# EAGLE board LEDboard (EAGLE 9.5.2)
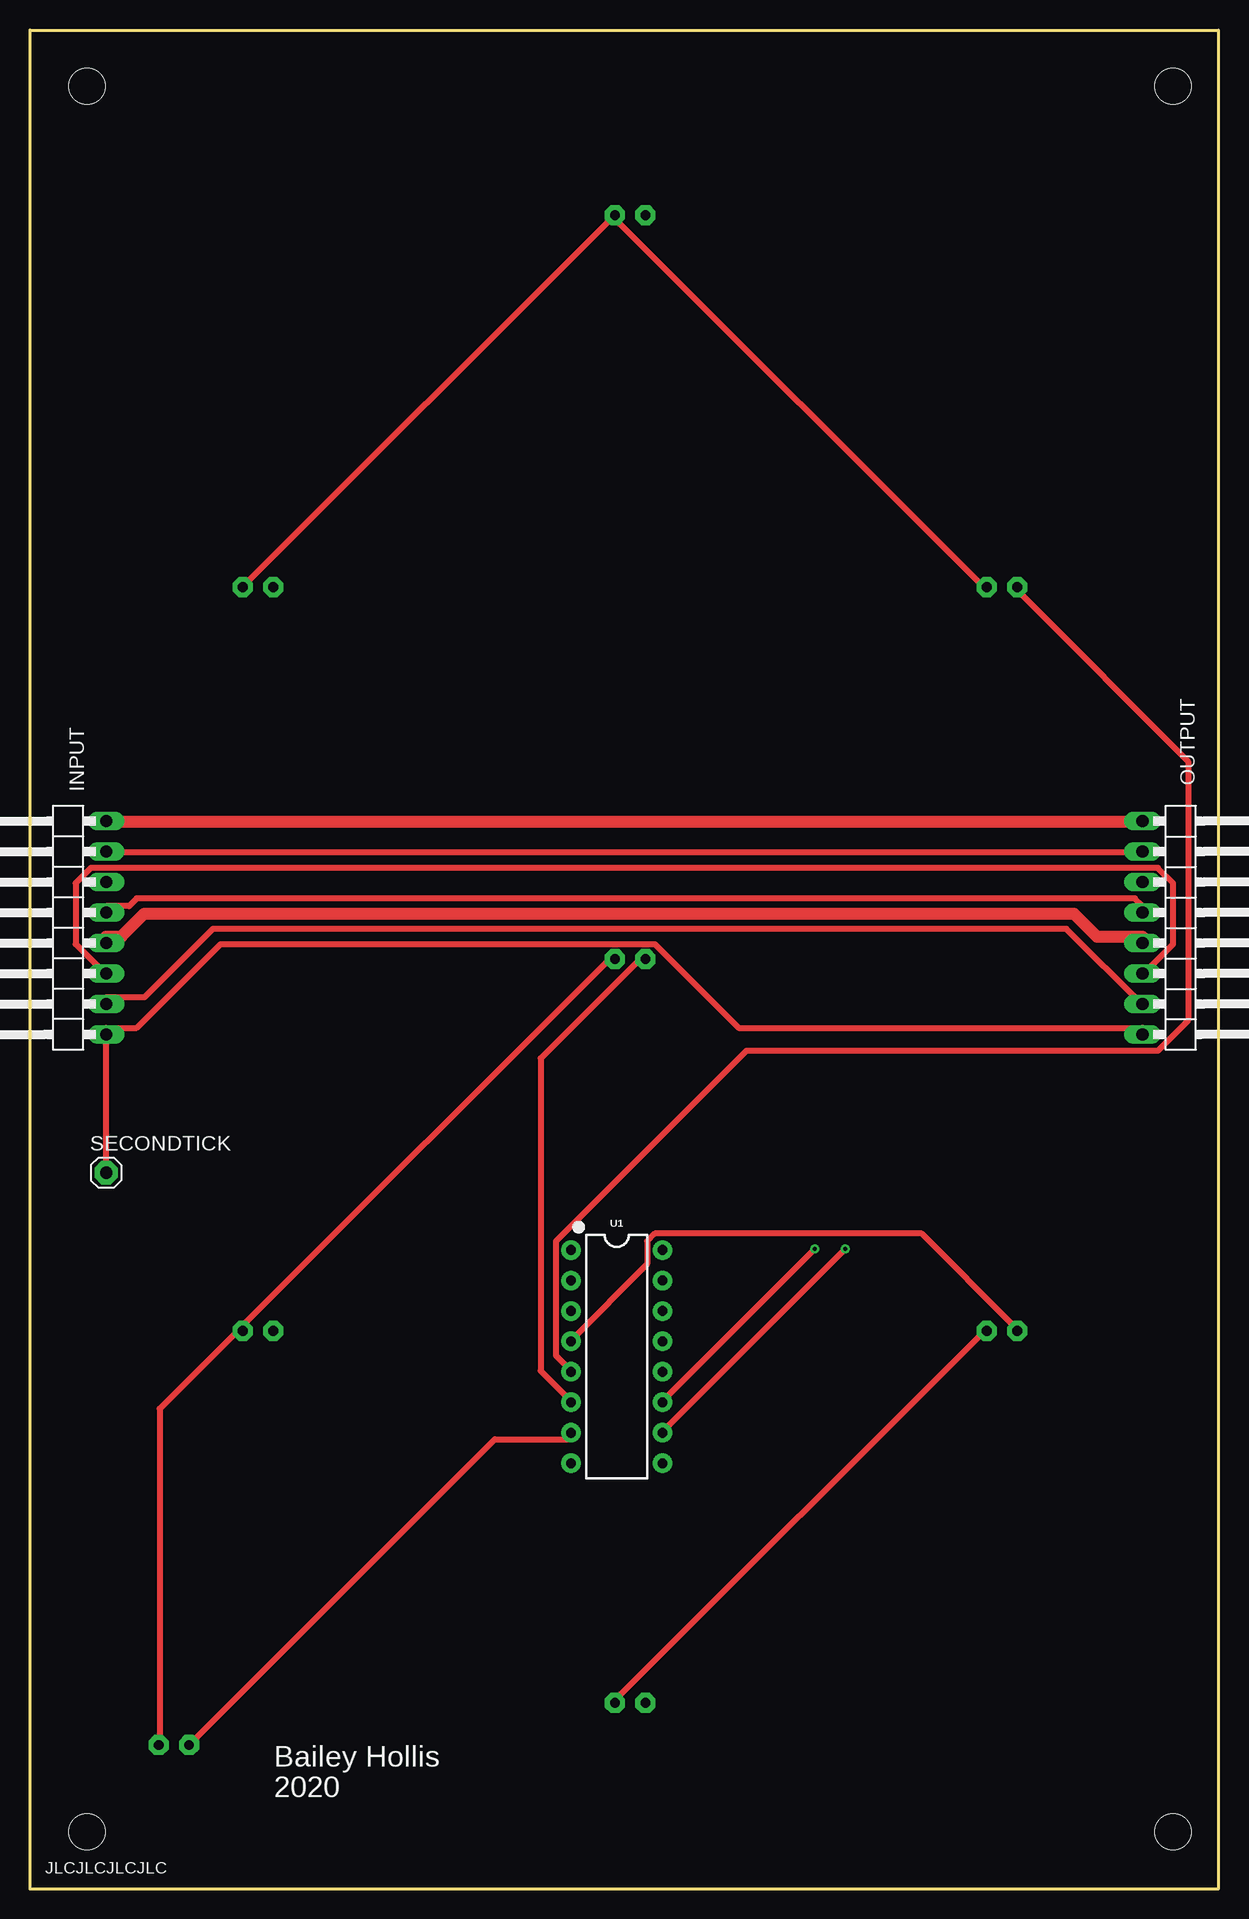
[diagram p0: board, top side]
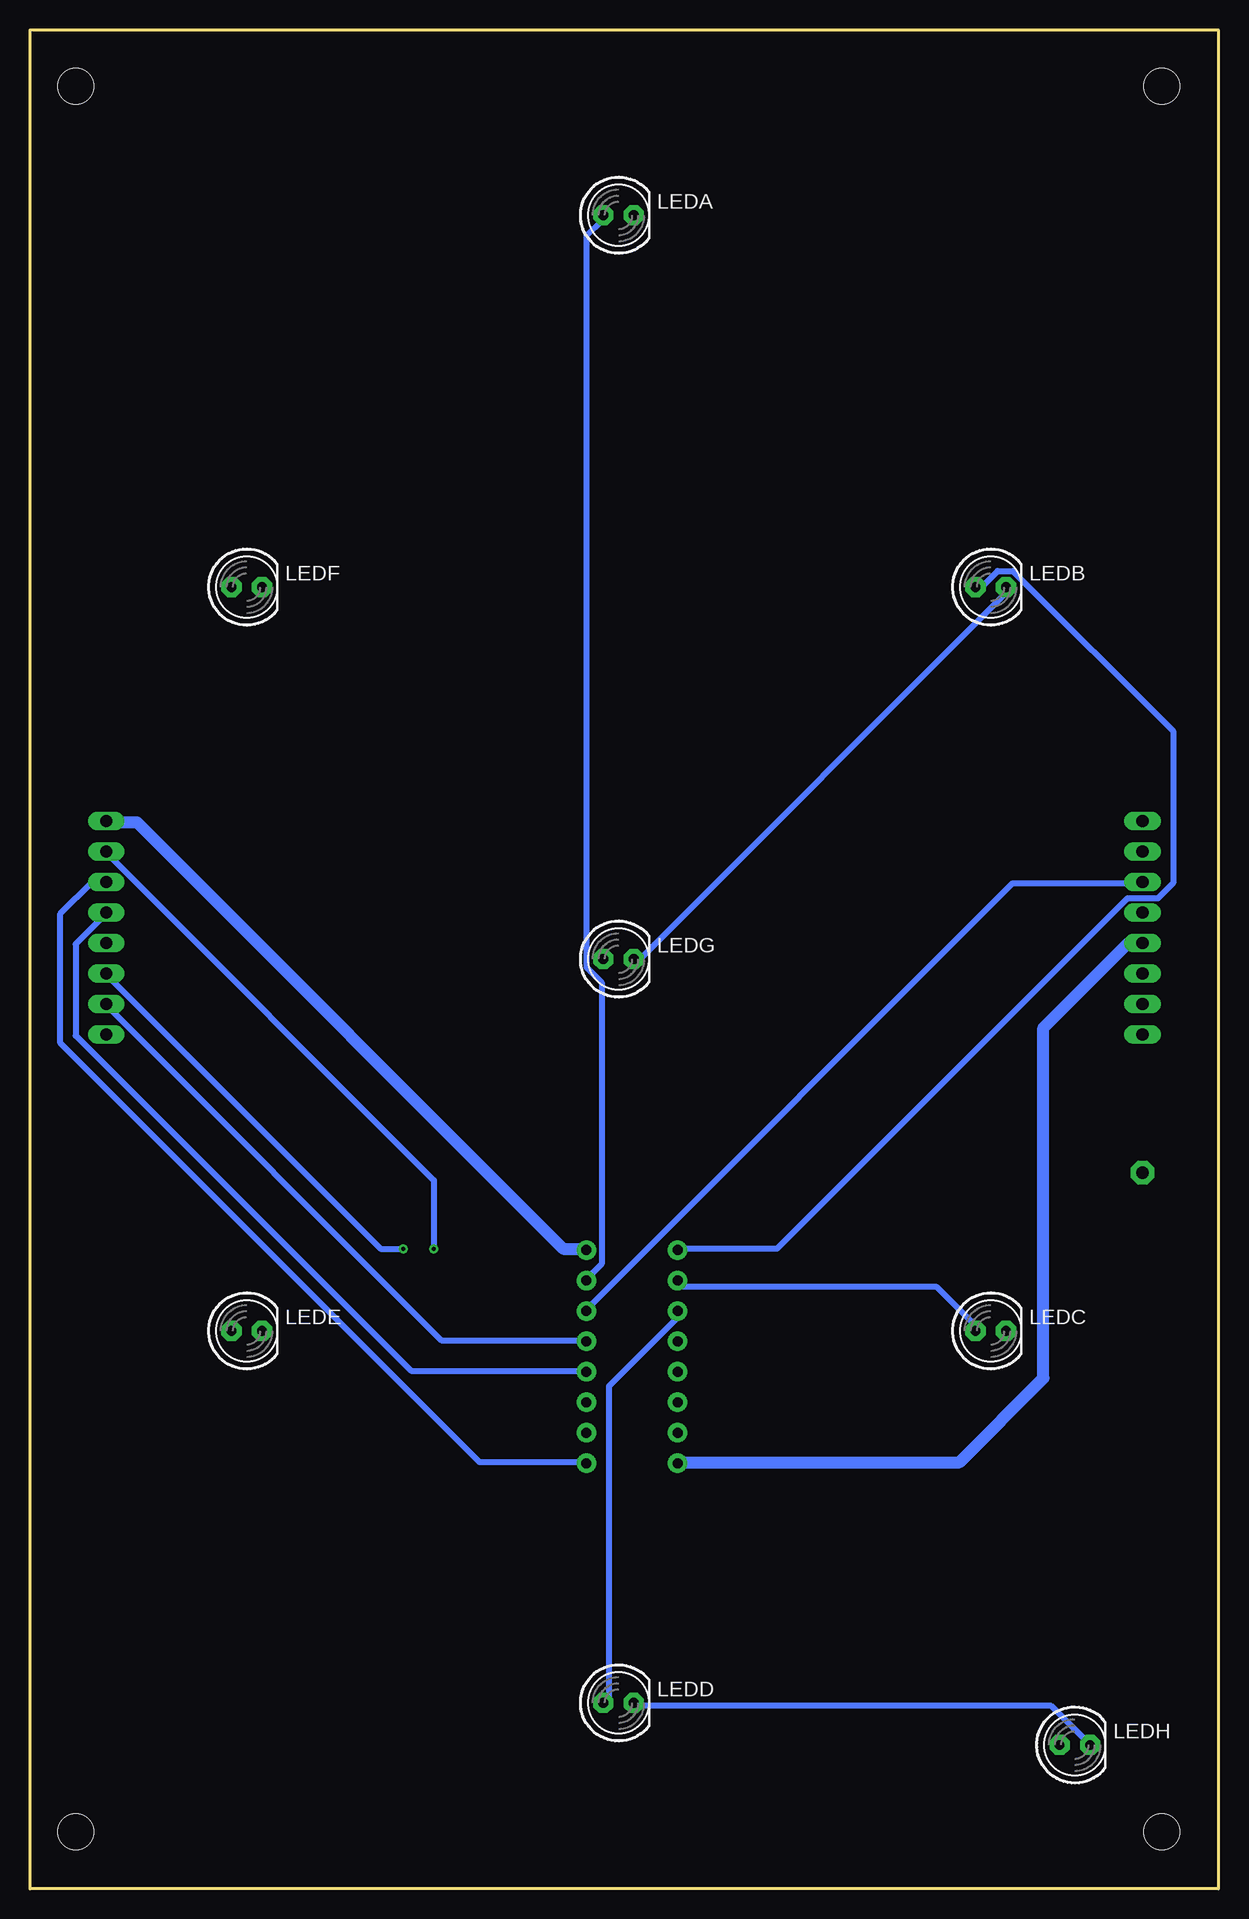
[diagram p1: board, bottom side, seen from below]

Size 99.06 x 154.94 mm. Coordinates in mm from the lower left corner, seen from the top.
Outline: 0,0 99.06,0 99.06,154.94 0,154.94 0,0
Copper layers (1*16): Top 0.035mm / dielectric 1.5mm / Bottom 0.035mm
Design rules "default *": minimum track width 20mil, minimum drill 0.35mm, track to track 20mil, track to pad 6mil, pad to pad 6mil, via to via 6mil, smd to smd 6mil, copper to edge 40mil, drill to drill 6mil, minimum pad ring 10mil, minimum via ring 8mil, stop-mask expansion 4mil, vias tented up to drill 0mil, thermal gap 10mil
Net classes: 0 default: width 0.254 mm, clearance 0.127 mm
Holes 3 mm at 4.75,150.25 4.75,4.75 95.25,4.75 95.25,150.25

## Footprints (pad centres in the part's own frame; a part is rotated, then mirrored left to right if it is on the bottom)
1X08/90 = drill 1.016 long: 1 -8.89,-3.81; 2 -6.35,-3.81; 3 -3.81,-3.81; 4 -1.27,-3.81; 5 1.27,-3.81; 6 3.81,-3.81; 7 6.35,-3.81; 8 8.89,-3.81
LED5MM = drill 0.813 pad 1.676 octagon: A -1.27,0; K 1.27,0
1X01 = drill 1.016 pad 1.93 octagon: 1 0,0
DIP16 = drill 0.813 pad 1.626: 1 -8.89,-3.81; 2 -6.35,-3.81; 3 -3.81,-3.81; 4 -1.27,-3.81; 5 1.27,-3.81; 6 3.81,-3.81; 7 6.35,-3.81; 8 8.89,-3.81; 9 8.89,3.81; 10 6.35,3.81; 11 3.81,3.81; 12 1.27,3.81; 13 -1.27,3.81; 14 -3.81,3.81; 15 -6.35,3.81; 16 -8.89,3.81

## Placement (x,y rotation side)
INPUT  [1X08/90]  2.54,80.1 90 top
LEDA  [LED5MM]  50.01,139.5 0 bottom
LEDB  [LED5MM]  19,108.51 0 bottom
LEDC  [LED5MM]  19,46.51 0 bottom
LEDD  [LED5MM]  50.01,15.49 0 bottom
LEDE  [LED5MM]  81,46.51 0 bottom
LEDF  [LED5MM]  81,108.51 0 bottom
LEDG  [LED5MM]  50.01,77.5 0 bottom
LEDH  [LED5MM]  11.99,11.99 0 bottom
OUTPUT  [1X08/90]  96.52,80.1 270 top
SECONDTICK  [1X01]  6.35,59.69 0 top
U1  SN74HC595N  [DIP16]  48.9,44.36 270 top

## Library data of the parts
INPUT OUTPUT = pinhead
LEDA LEDB LEDC LEDD LEDE LEDF LEDG LEDH SECONDTICK = adafruit
U1 = SparkFun-IC-Logic; PROD_ID: IC-13123

## Nets
CLEAR: INPUT.3 OUTPUT.6 U1.10
CLOCK: INPUT.7 OUTPUT.2 U1.11
DATAIN: INPUT.6 U1.14
DATAOUT: OUTPUT.3 U1.9
ENABLE: INPUT.2 OUTPUT.7 U1.13
GND: LEDA.K LEDB.K LEDC.K LEDD.K LEDE.K LEDF.K LEDG.K LEDH.K
GROUND: INPUT.4 OUTPUT.5 U1.8
LATCH: INPUT.5 OUTPUT.4 U1.12
N$1: LEDD.A U1.3
N$2: LEDA.A U1.15
N$9: LEDB.A U1.1
N$17: LEDC.A U1.2
N$19: LEDE.A U1.4
N$20: LEDF.A U1.5
N$21: LEDG.A U1.6
N$22: LEDH.A U1.7
TICK: INPUT.1 OUTPUT.8 SECONDTICK.1
VCC: INPUT.8 OUTPUT.1 U1.16

## Tracks (layer width: path | path; a pad name or v marks a point on that pad's centre or on a via)
CLEAR  (via drill 0.35)
  Top 0.508: INPUT.3 6.35,76.83 5.71,76.83 3.81,78.74 3.81,83.82 5.08,85.09 93.98,85.09 95.25,83.82 95.25,78.74 92.71,76.2 OUTPUT.6 | v67.94,53.34 52.7,38.1 U1.10
  Bottom 0.508: v67.94,53.34 69.85,53.34 92.71,76.2 OUTPUT.6
CLOCK  (via drill 0.35)
  Top 0.508: INPUT.7 6.35,86.36 92.71,86.36 OUTPUT.2 | v65.41,53.34 52.7,40.64 U1.11
  Bottom 0.508: v65.41,53.34 65.41,59.05 92.71,86.36 OUTPUT.2
DATAIN
  Bottom 0.508: INPUT.6 6.35,83.82 17.14,83.82 52.75,48.21 U1.14
DATAOUT
  Bottom 0.508: OUTPUT.3 93.89,83.91 96.52,81.28 96.52,70.48 61.59,35.56 52.7,35.56 U1.9
ENABLE
  Top 0.508: INPUT.2 6.35,74.3 9.53,74.3 15.24,80.01 86.36,80.01 92.71,73.66 OUTPUT.7
  Bottom 0.508: U1.13 52.7,45.72 64.77,45.72 92.71,73.66 OUTPUT.7
GND
  Top 0.508: LEDB.K 17.78,108.58 48.26,139.06 LEDA.K 48.9,139.06 79.38,108.58 LEDF.K | LEDH.K 10.79,12.06 10.79,40.01 17.14,46.35 LEDC.K 17.78,46.99 48.26,77.47 LEDG.K | LEDE.K 79.38,46.35 48.9,15.88 LEDD.K
  Bottom 0.508: LEDH.K 13.97,15.24 48.26,15.24 LEDD.K | LEDB.K 17.78,107.95 48.26,77.47 LEDG.K
GROUND
  Top 1.016: OUTPUT.5 92.71,79.38 88.9,79.38 87,81.28 9.53,81.28 7.62,79.38 6.35,79.38 INPUT.4
  Bottom 0.508: 45.09,35.56 U1.8
  Bottom 1.016: INPUT.4 7.53,78.83 14.61,71.75 14.61,42.55 21.59,35.56 45.09,35.56
LATCH
  Top 0.508: INPUT.5 6.35,81.92 8.26,81.92 8.89,82.55 92.08,82.55 92.71,81.92 OUTPUT.4
  Bottom 0.508: U1.12 52.7,43.18 67.31,43.18 95.25,71.12 95.25,78.74 92.71,81.28 OUTPUT.4
N$1
  Bottom 0.508: U1.3 45.09,47.62 50.8,41.91 50.8,15.88 LEDD.A
N$2
  Bottom 0.508: U1.15 52.7,50.8 51.44,52.07 51.44,75.56 52.7,76.83 52.7,137.79 51.44,139.06 LEDA.A
N$9
  Bottom 0.508: U1.1 45.09,53.34 36.83,53.34 7.62,82.55 5.08,82.55 3.81,83.82 3.81,96.52 17.14,109.86 18.41,109.86 19.68,108.58 LEDB.A
N$17
  Bottom 0.508: U1.2 45.09,50.16 23.5,50.16 20.32,46.99 LEDC.A
N$19
  Top 0.508: U1.4 45.09,45.72 51.44,52.07 51.44,53.98 52.07,54.61 74.3,54.61 81.92,46.99 LEDE.A
N$20
  Top 0.508: U1.5 45.09,43.18 43.81,44.45 43.81,53.98 59.69,69.85 93.98,69.85 96.52,72.39 96.52,93.98 82.55,107.95 LEDF.A
N$21
  Top 0.508: U1.6 45.09,40.64 42.55,43.18 42.55,69.22 50.8,77.47 LEDG.A
N$22
  Top 0.508: LEDH.A 38.73,37.47 45.09,37.47 U1.7
TICK
  Top 0.508: SECONDTICK.1 INPUT.1 6.35,71.75 8.89,71.75 15.88,78.74 52.07,78.74 59.05,71.75 92.71,71.75 OUTPUT.8
VCC
  Top 0.508: 6.35,88.9 INPUT.8 | 92.71,88.9 OUTPUT.1
  Top 1.016: 92.71,88.9 6.35,88.9
  Bottom 0.508: 52.7,53.34 U1.16
  Bottom 1.016: 52.7,53.34 54.61,53.34 90.17,88.9 92.62,88.9 OUTPUT.1

## Text on the board
tNames: Bailey Hollis | 2020 | JLCJLCJLCJLC